# EAGLE board pov (EAGLE 6.1)
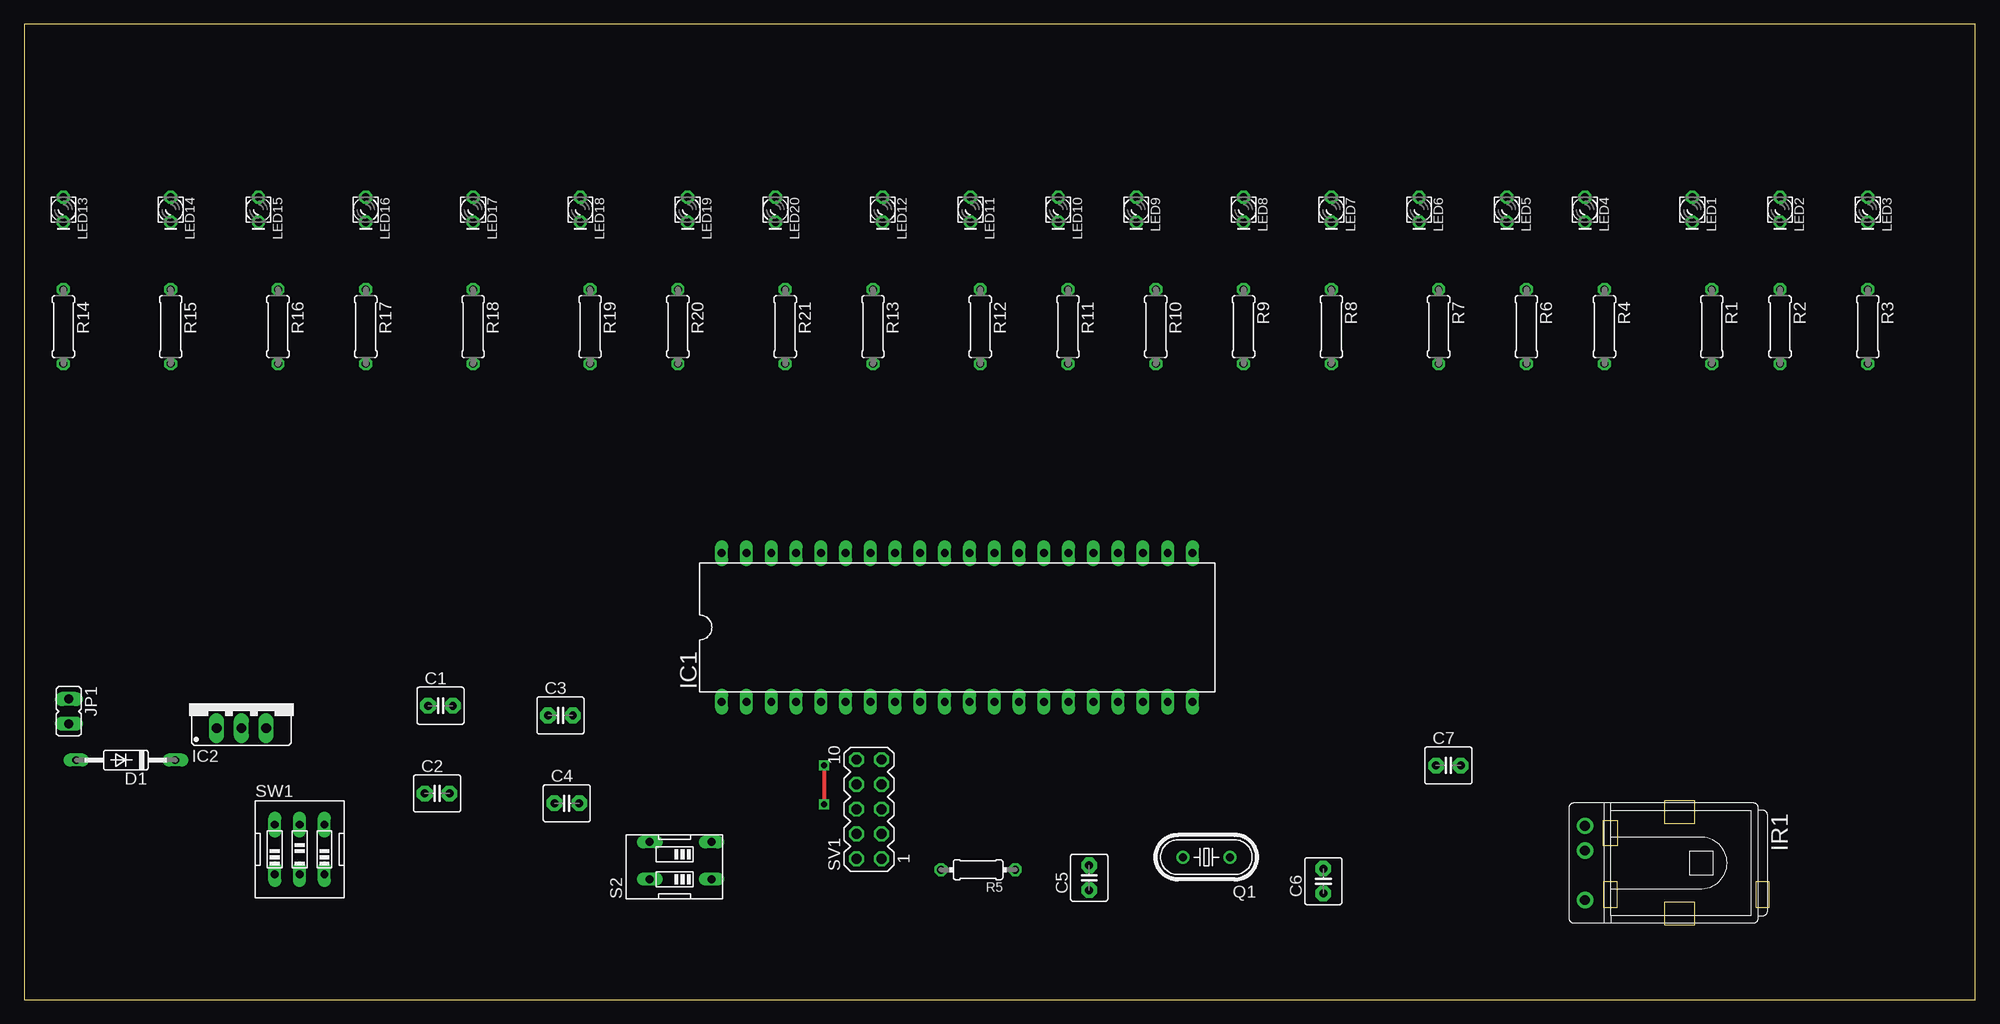
[diagram p0: board, top side]
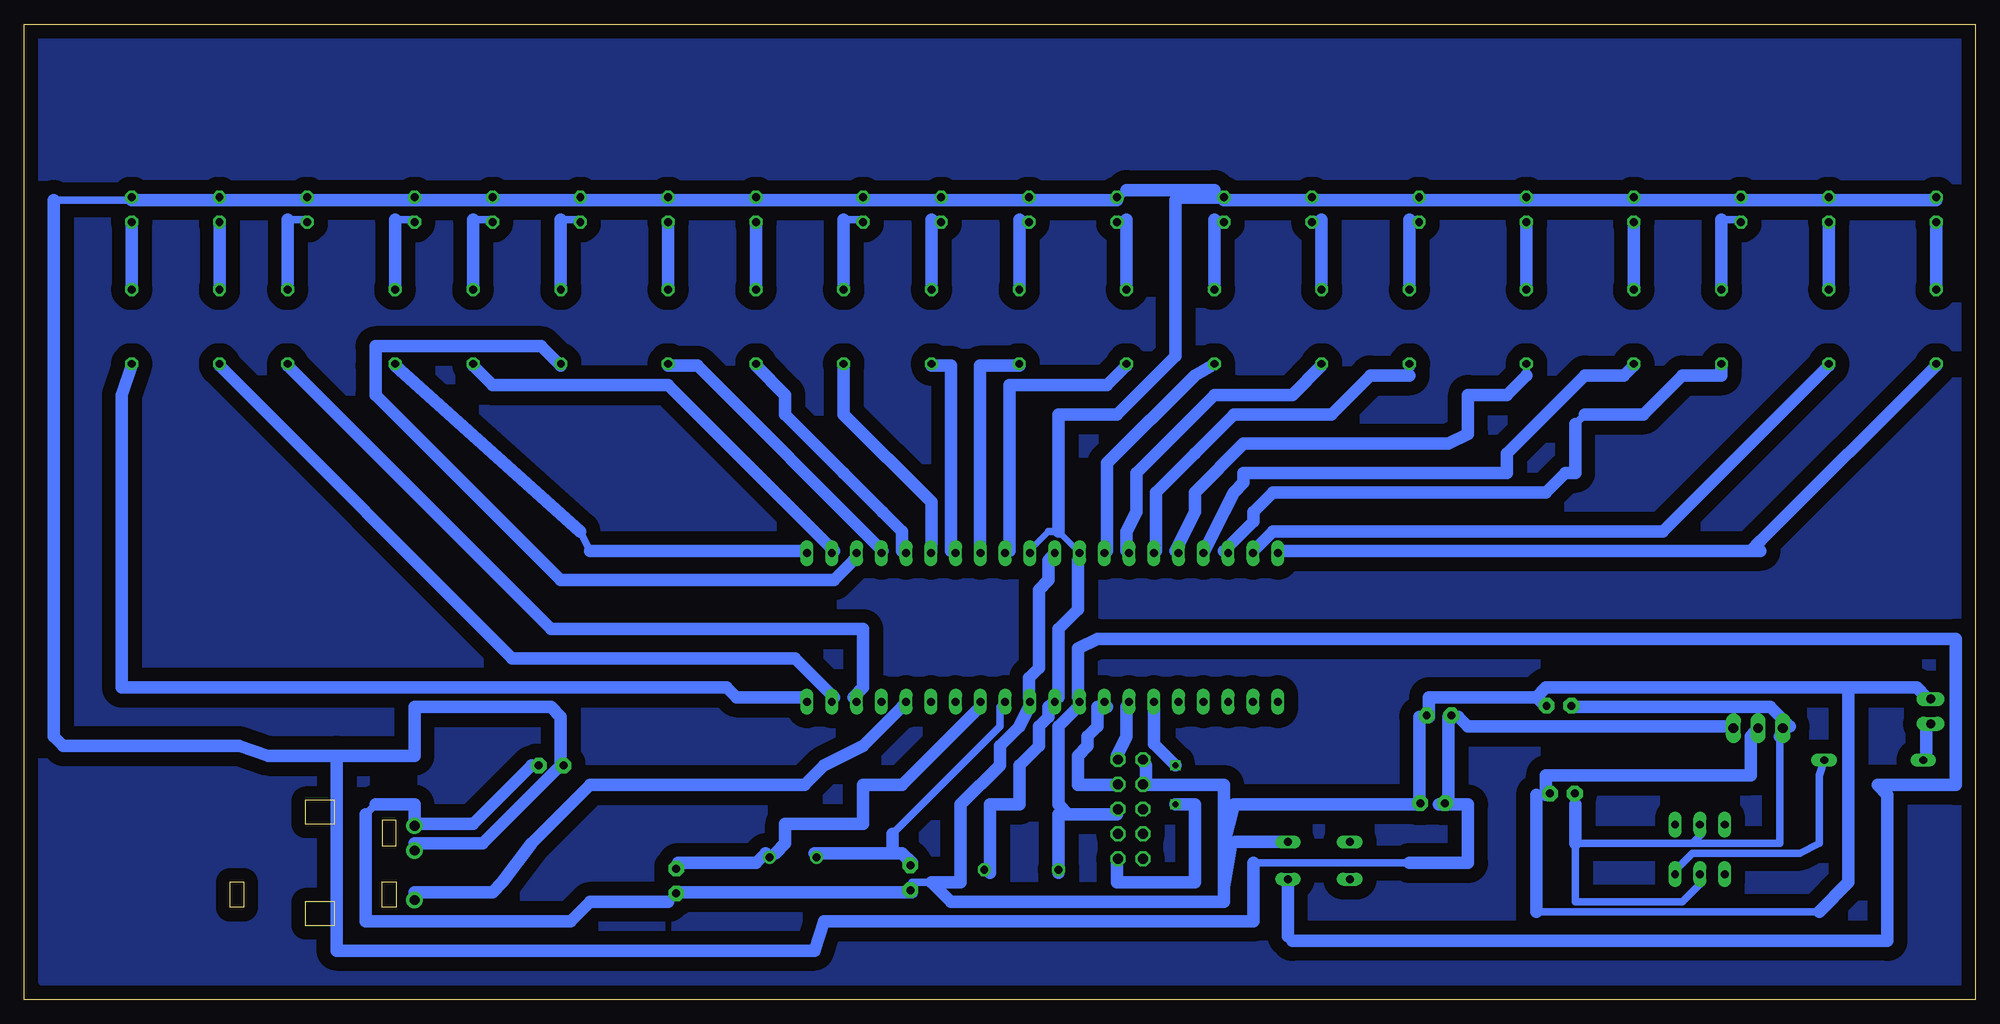
[diagram p1: board, bottom side, seen from below]

Size 200 x 100 mm. Coordinates in mm from the lower left corner, seen from the top.
Outline: 0,0 200,0 200,100 0,100 0,0
Copper layers (1*16): Top 0.035mm / dielectric 1.5mm / Bottom 0.035mm
Design rules: minimum track width 30mil, minimum drill 24mil, track to track 8mil, track to pad 8mil, pad to pad 8mil, via to via 8mil, smd to smd 8mil, copper to edge 40mil, drill to drill 8mil, minimum pad ring 10mil, minimum via ring 8mil, stop-mask expansion 4mil, vias tented up to drill 0mil, thermal gap 10mil

## Footprints (pad centres in the part's own frame; a part is rotated, then mirrored left to right if it is on the bottom)
C2.5-4 = drill 0.813 pad 1.6 octagon: 1 -1.27,0; 2 1.27,0
DO35-10 = drill 0.813 long: A 5.08,0; C -5.08,0
DIL40 = drill 0.813 long: 1 -24.13,-7.62; 2 -21.59,-7.62; 3 -19.05,-7.62; 4 -16.51,-7.62; 5 -13.97,-7.62; 6 -11.43,-7.62; 7 -8.89,-7.62; 8 -6.35,-7.62; 9 -3.81,-7.62; 10 -1.27,-7.62; 11 1.27,-7.62; 12 3.81,-7.62; 13 6.35,-7.62; 14 8.89,-7.62; 15 11.43,-7.62; 16 13.97,-7.62; 17 16.51,-7.62; 18 19.05,-7.62; 19 21.59,-7.62; 20 24.13,-7.62; 21 24.13,7.62; 22 21.59,7.62; 23 19.05,7.62; 24 16.51,7.62; 25 13.97,7.62; 26 11.43,7.62; 27 8.89,7.62; 28 6.35,7.62; 29 3.81,7.62; 30 1.27,7.62; 31 -1.27,7.62; 32 -3.81,7.62; 33 -6.35,7.62; 34 -8.89,7.62; 35 -11.43,7.62; 36 -13.97,7.62; 37 -16.51,7.62; 38 -19.05,7.62; 39 -21.59,7.62; 40 -24.13,7.62
78XXS = drill 1.016 long: GND 0,-2.54; IN -2.54,-2.54; OUT 2.54,-2.54
TSOP17_TB1 = drill 1 pad 1.676: GND 0,-3.81; VO 0,3.81; VS 0,-1.27
JP1 = drill 0.914 long: 1 0,-1.27; 2 0,1.27
LED_LD260 = drill 0.813 octagon: A -1.27,0; K 1.27,0
HC49U-V = drill 0.813: 1 -2.413,0; 2 2.413,0
0207/7 = drill 0.813 octagon: 1 -3.81,0; 2 3.81,0
0204/7 = drill 0.813 octagon: 1 -3.81,0; 2 3.81,0
EDG-02 = drill 0.813 long: 1 -1.27,-3.81; 2 2.54,-3.81; 3 2.54,2.54; 4 -1.27,2.54
MA05-2 = drill 1.016 octagon: 1 -5.08,-1.27; 2 -5.08,1.27; 3 -2.54,-1.27; 4 -2.54,1.27; 5 0,-1.27; 6 0,1.27; 7 2.54,-1.27; 8 2.54,1.27; 9 5.08,-1.27; 10 5.08,1.27
EDG-03 = drill 0.813 long: 1 -2.54,-2.54; 2 0,-2.54; 3 2.54,-2.54; 4 2.54,2.54; 5 0,2.54; 6 -2.54,2.54

## Placement (x,y rotation side)
C1  470uF  [C2.5-4]  42.66,30.13 0 top
C2  0.1uF  [C2.5-4]  42.31,21.13 0 top
C3  4.7uF  [C2.5-4]  54.96,29.13 0 top
C4  0.1uF  [C2.5-4]  55.61,20.13 0 top
C5  33pF  [C2.5-4]  109.17,12.49 90 top
C6  33pF  [C2.5-4]  133.17,12.14 90 top
C7  470uF  [C2.5-4]  146,24 0 top
D1  1N4148DO35-10  [DO35-10]  10.4,24.55 180 top
IC1  MEGA163LP  [DIL40]  95.63,38.16 0 top
IC2  [78XXS]  22.25,30.37 0 top
IR1  TSOP1733TB1  [TSOP17_TB1]  160,14 180 top
JP1  [JP1]  4.56,29.55 180 top
LED1  [LED_LD260]  171,81 270 top
LED2  [LED_LD260]  180,81 270 top
LED3  [LED_LD260]  189,81 270 top
LED4  [LED_LD260]  160,81 270 top
LED5  [LED_LD260]  152,81 270 top
LED6  [LED_LD260]  143,81 270 top
LED7  [LED_LD260]  134,81 270 top
LED8  [LED_LD260]  125,81 270 top
LED9  [LED_LD260]  114,81 270 top
LED10  [LED_LD260]  106,81 270 top
LED11  [LED_LD260]  97,81 270 top
LED12  [LED_LD260]  88,81 270 top
LED13  [LED_LD260]  4,81 270 top
LED14  [LED_LD260]  15,81 270 top
LED15  [LED_LD260]  24,81 270 top
LED16  [LED_LD260]  35,81 270 top
LED17  [LED_LD260]  46,81 270 top
LED18  [LED_LD260]  57,81 270 top
LED19  [LED_LD260]  68,81 270 top
LED20  [LED_LD260]  77,81 270 top
Q1  16MHZ  [HC49U-V]  121.18,14.6 180 top
R1  [0207/7]  173,69 270 top
R2  [0207/7]  180,69 270 top
R3  [0207/7]  189,69 270 top
R4  [0207/7]  162,69 270 top
R5  10K  [0204/7]  97.78,13.31 180 top
R6  [0207/7]  154,69 270 top
R7  [0207/7]  145,69 270 top
R8  [0207/7]  134,69 270 top
R9  [0207/7]  125,69 270 top
R10  [0207/7]  116,69 270 top
R11  [0207/7]  107,69 270 top
R12  [0207/7]  98,69 270 top
R13  [0207/7]  87,69 270 top
R14  [0207/7]  4,69 270 top
R15  [0207/7]  15,69 270 top
R16  [0207/7]  26,69 270 top
R17  [0207/7]  35,69 270 top
R18  [0207/7]  46,69 270 top
R19  [0207/7]  58,69 270 top
R20  [0207/7]  67,69 270 top
R21  [0207/7]  78,69 270 top
S2  [EDG-02]  66.65,13.61 90 top
SV1  [MA05-2]  86.6,19.52 90 top
SW1  [EDG-03]  28.22,15.4 0 top

## Library data of the parts
C1-C7 = capacitor-wima
D1 = diode
IC1 = atmel; OC_FARNELL: unknown; OC_NEWARK: unknown
IC2 = v-reg
IR1 = telefunken; OC_FARNELL: unknown; OC_NEWARK: unknown
JP1 = jumper
LED1-LED20 = eagle-ltspice; SPICEMODEL: NONE; SPICEPREFIX: D; SPICETYPE: diode
Q1 = crystal; OC_FARNELL: 1666969; OC_NEWARK: unknown
R1-R4 R6-R21 = rcl
R5 = resistor
S2 SW1 = special
SV1 = con-lstb; OC_FARNELL: unknown; OC_NEWARK: unknown

## Nets
+5V: C3.1 C4.1 C7.1 IC1.10 IC1.30 IC1.32 IC2.OUT IR1.VS LED1.A LED2.A LED3.A LED4.A LED5.A LED6.A LED7.A LED8.A LED9.A LED10.A LED11.A LED12.A LED13.A LED14.A LED15.A LED16.A LED17.A LED18.A LED19.A LED20.A R5.1
GND: C1.2 C2.2 C3.2 C4.2 C5.1 C6.1 C7.2 IC1.11 IC1.31 IC2.GND IR1.GND JP1.1 S2.2 SV1.8 SV1.10
N$1: D1.A JP1.2
N$2: LED12.K R13.1
N$3: C5.2 IC1.12 Q1.2
N$4: C6.2 IC1.13 Q1.1
N$5: LED1.K R1.1
N$6: IC1.9 R5.2 S2.1 SV1.5
N$7: IC1.22 R6.2
N$8: D1.C SW1.3
N$9: C1.1 C2.1 IC2.IN SW1.2 SW1.5
N$10: IC1.1
N$11: IC1.2
N$12: IC1.3
N$13: IC1.4
N$14: IC1.17
N$16: IC1.5
N$17: IC1.28 R12.2
N$18: LED10.K R11.1
N$19: IC1.26 R10.2
N$20: LED9.K R10.1
N$21: IC1.25 R9.2
N$22: LED8.K R9.1
N$23: LED7.K R8.1
N$24: IC1.6 SV1.1
N$25: IC1.7 SV1.9
N$26: IC1.8 SV1.7
N$27: IC1.14
N$28: IC1.23 R7.2
N$29: IC1.33 R21.2
N$30: IC1.34 R20.2
N$31: IC1.35 R19.2
N$32: IC1.36 R18.2
N$33: IC1.37 R17.2
N$34: IC1.38 R16.2
N$35: IC1.39 R15.2
N$36: IC1.40 R14.2
N$37: IC1.24 R8.2
N$38: IC1.27 R11.2
N$39: IC1.29 R13.2
N$40: LED6.K R7.1
N$41: LED20.K R21.1
N$42: LED19.K R20.1
N$43: LED18.K R19.1
N$44: LED17.K R18.1
N$45: LED15.K R16.1
N$46: LED13.K R14.1
N$47: LED16.K R17.1
N$48: LED14.K R15.1
N$49: LED5.K R6.1
N$50: LED11.K R12.1
N$51: LED2.K R2.1
N$52: LED3.K R3.1
N$53: LED4.K R4.1
N$54: IC1.20 R3.2
N$55: IC1.21 R4.2
N$56: IC1.19 R2.2
N$57: IC1.18 R1.2
N$58: IC1.16 IR1.VO

## Tracks (layer width: path | path; a pad name or v marks a point on that pad's centre or on a via)
+5V
  Bottom 0.61: 94,48 92,46 | 97,46 95,48
  Bottom 0.762: 95,48 94,48 | 92,46 IC1.32 92,45 | 97,46 IC1.30 | 94,31 IC1.10 | 101,13 R5.1 | 4,82 LED13.A | 15,82 LED14.A | 24,82 LED15.A | 35,82 LED16.A | 46,82 LED17.A | 68,82 LED19.A | 57,82 LED18.A | 77,82 82,82 | 25,28 IC2.OUT | 53,29 C3.1 54,29 | 54,20 C4.1 55,20 | 106,82 LED10.A | 97,82 LED11.A | 160,16 IR1.VS | 180,82 LED2.A | 134,82 LED7.A | 152,82 LED5.A | 143,82 LED6.A | 171,82 LED1.A | 160,82 LED4.A | 197,82 189,82 LED3.A | 145,24 C7.1 | 114,82 LED9.A | 125,82 LED8.A | 74,14 58,14 | 78,83 77,82 | 87,83 88,82 LED12.A | 77,82 LED20.A
  Bottom 1.27: 92,45 92,40 94,38 94,31 | 101,13 101,20 98,20 98,24 96,26 96,28 95,29 95,30 IC1.10 | 77,82 68,82 57,82 46,82 35,82 24,82 15,82 4,82 | 94,48 94,60 88,60 82,66 82,82 | 25,28 52,28 53,29 | 54,29 54,20 | 88,82 97,82 106,82 114,82 125,82 134,82 143,82 152,82 160,82 171,82 180,82 189,82 | 160,16 153,16 145,24 145,29 146,30 160,30 160,25 168,25 | 197,82 197,27 196,26 178,26 175,25 168,25 | 58,14 52,14 52,20 55,20 | 74,14 74,8 118,8 119,5 168,5 168,25 | 87,83 78,83
GND
  Bottom 0.762: 44,21 C2.2 45,21 | 85,22 SV1.8 | 57,29 C3.2 56,29 | 5,31 JP1.1 | 44,30 C1.2 | 57,20 C4.2 | 16,9 45,9 | 148,24 C7.2 | 97,31 IC1.11 97,30 | 109,11 C5.1 109,12 107,12 | 165,19 164,20 | 134,10 133,11 C6.1 | 160,18 IR1.GND | 77,10 76,16 75.85,16.15
  Bottom 1.27: 44,21 44,23 23,23 23,27 IC2.GND | 77,16 77,22 85,22 85,24 SV1.10 | 77,16 77,10 105,10 107,12 105,12 104,12 104,20 100,24 100,26 98,28 97,30 | 57,29 57,20 76,20 77,16 | 5,31 6,32 13,32 | 13,32 44,32 45,31 | 44,30 45,31 | 56,29 56,31 45,31 | 45,9 45,21 | 16,9 13,12 13,32 | 148,24 154,18 160,18 160,20 164,20 | 97,31 97,33 96,34 96,42 95,43 95,45 IC1.31 | 109,11 133,11 | 165,19 165,8 144,8 142,10 134,10 | 75.85,16.15 S2.2
N$1
  Bottom 0.762: 5,25 D1.A | 5,28 JP1.2
  Bottom 1.27: 5,28 5,25
N$2
  Bottom 0.762: 87,80 88,80 LED12.K
  Bottom 1.27: 87,80 R13.1
N$3
  Bottom 0.762: 111,17 100,28 100,30 IC1.12 | 109,14 C5.2
  Bottom 1.27: 111,15 115,15 119,15 Q1.2 | 111,15 111,17 | 109,14 110,15 111,15
N$4
  Bottom 0.762: 133,14 C6.2 | 124,15 123,15 | 102,30 IC1.13
  Bottom 1.27: 133,14 125,14 124,15 Q1.1 | 102,30 110,22 114,22 114,18 122,18 122,16 123,15
N$5
  Bottom 0.762: 173,80 171,80 LED1.K
  Bottom 1.27: 173,80 R1.1
N$6
  Bottom 0.762: 94,13 R5.2 | 88,19 SV1.5 | 70,6 70.46,6.46 | 92,31 IC1.9 92,30
  Bottom 1.27: 94,13 94,19 93,19 | 88,19 93,19 | 70,6 9,6 9,21 10,22 2,22 2,37 90,37 92,36 92,31 | 70.46,6.46 S2.1 | 92,30 94,28 94,20 93,19
N$7
  Bottom 0.762: 117,46 IC1.22 | 154,65 R6.2
  Bottom 1.27: 117,46 134,63 152,63 154,65
N$8
  Bottom 0.762: D1.C 16,23 16,16 18,15 29,15 31,13 SW1.3
N$9
  Bottom 0.762: 41,20 41,21 C2.1 | SW1.2 28,12 30,10 41,10 41,16 29,16 | 29,16 28,17 SW1.5 | 20,27 20,16 29,16 | 41,30 C1.1 | 19,28 IC2.IN
  Bottom 1.27: 41,20 41,16 | 20,27 IC2.IN | 41,30 21,30 19,28
N$15
  pour Bottom (isolate 1.422): 2,0 0,2 0,98 2,100 198,100 200,98 200,4 196,0
N$17
  Bottom 0.762: 102,46 IC1.28 | 98,65 R12.2
  Bottom 1.27: 102,46 102,65 98,65
N$18
  Bottom 0.762: 107,80 106,80 LED10.K
  Bottom 1.27: 107,80 R11.1
N$19
  Bottom 0.762: 107,46 IC1.26
  Bottom 1.27: 107,46 107,51 116,60 R10.2
N$20
  Bottom 0.762: 116,80 114,80 LED9.K
  Bottom 1.27: 116,80 R10.1
N$21
  Bottom 0.762: 110,46 IC1.25 | 125,65 R9.2
  Bottom 1.27: 110,46 110,48 112,50 116,54 122,60 122,62 125,65
N$22
  Bottom 0.762: 125,80 LED8.K
  Bottom 1.27: LED8.K R9.1
N$23
  Bottom 0.762: 134,80 LED7.K
  Bottom 1.27: LED7.K R8.1
N$24  (via drill 0.6)
  Top 0.406: v82,24 v82,20
  Bottom 0.406: 88,14.31 SV1.1
  Bottom 1.27: IC1.6 84.2,26.2 v82,24 | v82,20 80,20 80,12 88,12 88,14.31
N$25
  Bottom 0.762: 88,25 SV1.9
  Bottom 1.27: 88,25 87,27 87,30 IC1.7
N$26
  Bottom 0.762: 89,30 IC1.8 | 88,22 SV1.7
  Bottom 1.27: 89,30 90,30 90,28 91,27 91,26 92,25 92,22 88,22
N$28
  Bottom 0.762: 115,45 IC1.23
  Bottom 1.27: 115,45 117,43 142,43 145,43 164,62 164,65 164,67 147,67 145,65 R7.2
N$29
  Bottom 0.762: 89,46 IC1.33
  Bottom 1.27: 89,46 89,55 80,64 R21.2
N$30
  Bottom 0.762: 67,65 R20.2 | 87,46 IC1.34
  Bottom 1.27: 67,65 70,62 76,62 78,62 86,54 86,50 87,48 87,46
N$31
  Bottom 0.762: 58,64 58,65 | 84,46 IC1.35
  Bottom 1.27: 58,64 62,64 66,60 74,60 76,60 80,56 84,52 84,46 | 58,65 R19.2
N$32
  Bottom 0.762: 46,64 R18.2 | 82,46 IC1.36
  Bottom 1.27: 46,64 48,62 52,62 52,58 54,57 75,57 80,52 80,50 82,46
N$33
  Bottom 0.762: 35,65 R17.2 | 79,46 IC1.37
  Bottom 1.27: 35,65 36,64 40,64 48,56 48,54 75,54 75,53 76,52 77,50 79,46
N$34
  Bottom 0.762: 41,59 40,60 | 77,46 IC1.38
  Bottom 1.27: 41,59 41,54 42,54 44,52 72,52 74,50 74,49 77,46 | 40,60 34,60 30,64 26,64 R16.2
N$35
  Bottom 0.762: 15,65 R15.2 | 74,46 IC1.39
  Bottom 1.27: 15,65 32,48 72,48 74,46
N$36
  Bottom 0.762: 22,46 22,47 | 4,65 R14.2 | 71,46 IC1.40
  Bottom 1.27: 23,46 22,47 4,65 | 71,46 22,46
N$37
  Bottom 0.762: 112,46 IC1.24 | 134,65 R8.2
  Bottom 1.27: 112,46 131,65 134,65
N$38
  Bottom 0.762: 105,46 IC1.27 | 107,65 R11.2
  Bottom 1.27: 105,46 105,65 107,65
N$39
  Bottom 0.762: 99,46 IC1.29 | 87,65 R13.2
  Bottom 1.27: 99,46 99,63 89,63 87,65
N$40
  Bottom 0.762: 145,80 143,80 LED6.K
  Bottom 1.27: 145,80 R7.1
N$41
  Bottom 0.762: 78,80 77,80 LED20.K
  Bottom 1.27: 78,80 R21.1
N$42
  Bottom 0.762: 67,80 68,80 LED19.K
  Bottom 1.27: 67,80 R20.1
N$43
  Bottom 0.762: 58,80 57,80 LED18.K
  Bottom 1.27: 58,80 R19.1
N$44
  Bottom 0.762: 46,80 LED17.K
  Bottom 1.27: LED17.K R18.1
N$45
  Bottom 0.762: 26,80 24,80 LED15.K
  Bottom 1.27: 26,80 R16.1
N$46
  Bottom 0.762: 4,80 LED13.K
  Bottom 1.27: LED13.K R14.1
N$47
  Bottom 0.762: 35,80 LED16.K
  Bottom 1.27: LED16.K R17.1
N$48
  Bottom 0.762: 15,80 LED14.K
  Bottom 1.27: LED14.K R15.1
N$49
  Bottom 0.762: 154,80 152,80 LED5.K
  Bottom 1.27: 154,80 R6.1
N$50
  Bottom 0.762: 98,80 97,80 LED11.K
  Bottom 1.27: 98,80 R12.1
N$51
  Bottom 0.762: 180,80 LED2.K
  Bottom 1.27: LED2.K R2.1
N$52
  Bottom 0.762: 189,80 LED3.K
  Bottom 1.27: LED3.K R3.1
N$53
  Bottom 0.762: 162,80 160,80 LED4.K
  Bottom 1.27: 162,80 R4.1
N$54
  Bottom 0.762: 120,31 IC1.20 | 189,65 R3.2
  Bottom 1.27: 120,31 127,31 128,32 190,32 190,62 189,65
N$55
  Bottom 0.762: 143,48 142,46 | 120,46 IC1.21 | 162,65 R4.2
  Bottom 1.27: 142,46 120,46 | 162,65 143,48
N$56
  Bottom 0.762: 117,31 IC1.19 | 180,65 R2.2
  Bottom 1.27: 117,31 121,35 150,35 180,65
N$57
  Bottom 0.762: 115,31 IC1.18 | 173,65 R1.2
  Bottom 1.27: 115,31 114,32 114,38 146,38 173,65
N$58
  Bottom 0.762: 160,11 IR1.VO
  Bottom 1.27: 160,11 152,11 151,12 148,16 142,22 120,22 118,24 114,26 110,30 IC1.16